# EAGLE board driverMotor_IlhamWidyoNugroho_21507334002_GK1 (EAGLE 7.3.0)
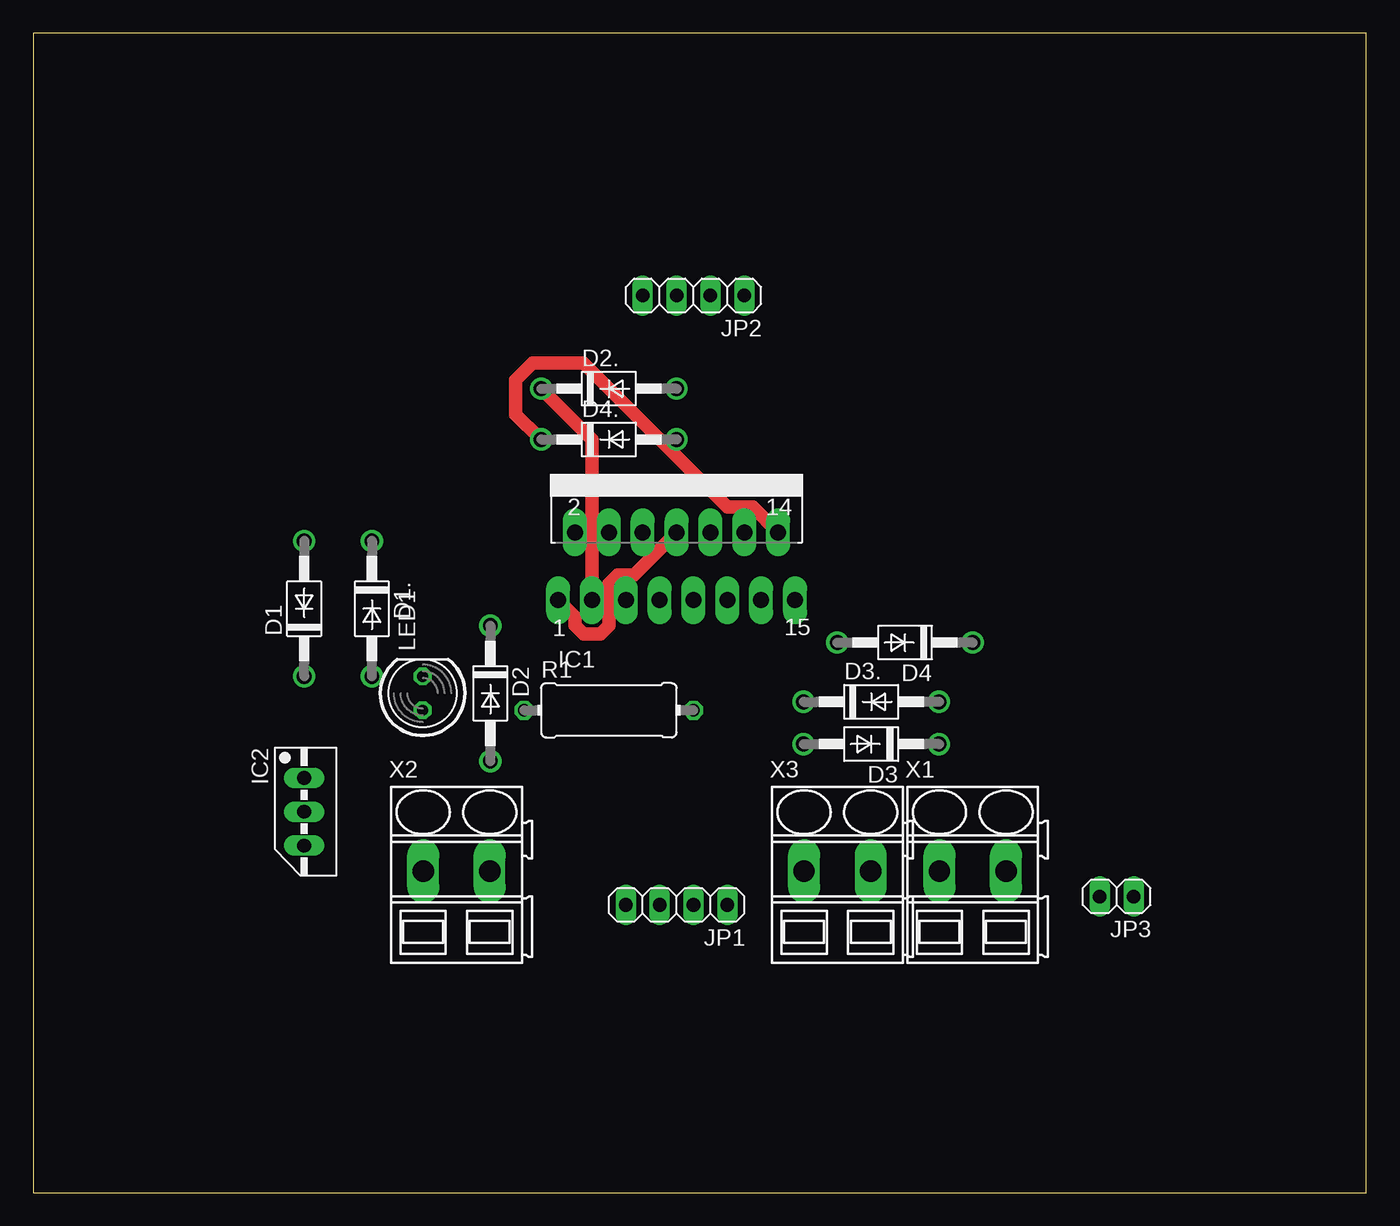
[diagram p0: board, top side]
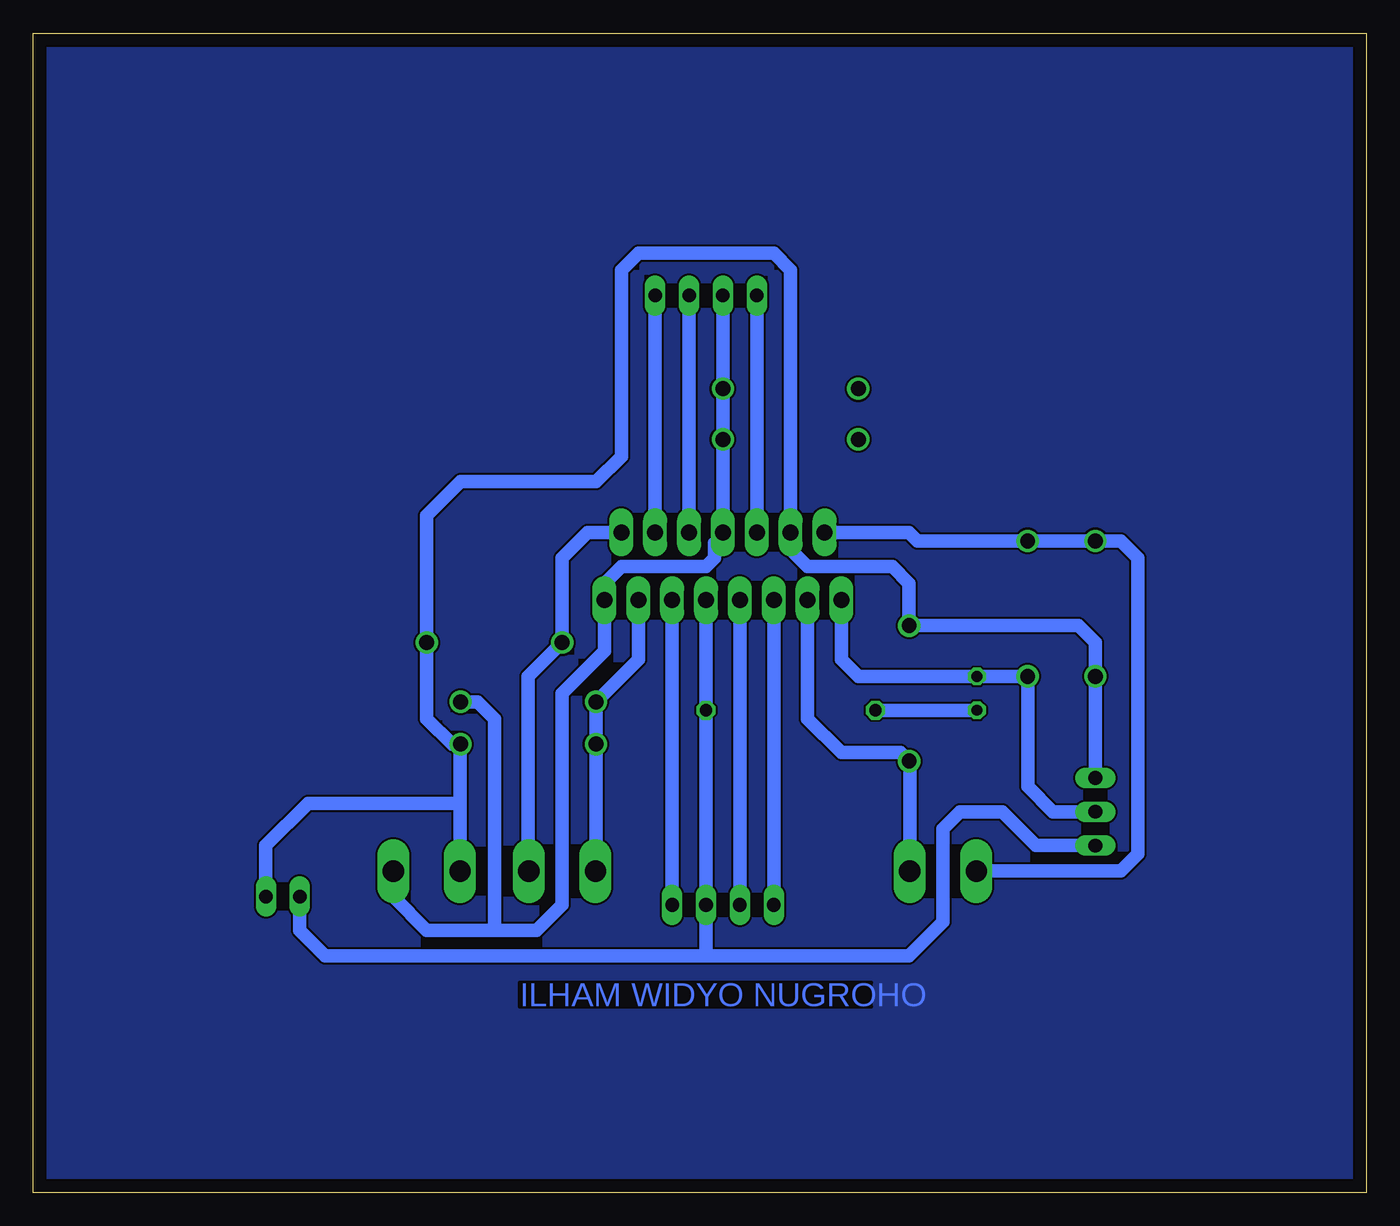
[diagram p1: board, bottom side, seen from below]

Size 100 x 86.98 mm. Coordinates in mm from the lower left corner, seen from the top.
Outline: 0,0 100,0 100,86.98 0,86.98 0,0
Copper layers (1*16): Top 0.035mm / dielectric 1.5mm / Bottom 0.035mm
Design rules "default": minimum track width 6mil, minimum drill 0.35mm, track to track 6mil, track to pad 6mil, pad to pad 6mil, via to via 6mil, smd to smd 6mil, copper to edge 40mil, drill to drill 6mil, minimum pad ring 10mil, minimum via ring 8mil, stop-mask expansion 4mil, vias tented up to drill 0mil, thermal gap 10mil

## Footprints (pad centres in the part's own frame; a part is rotated, then mirrored left to right if it is on the bottom)
DO41-10 = drill 1.118: A 5.08,0; C -5.08,0
MULTIWATT-15 = drill 1.2 long: 1 -8.89,-7.62; 2 -7.62,-2.54; 3 -6.35,-7.62; 4 -5.08,-2.54; 5 -3.81,-7.62; 6 -2.54,-2.54; 7 -1.27,-7.62; 8 0,-2.54; 9 1.27,-7.62; 10 2.54,-2.54; 11 3.81,-7.62; 12 5.08,-2.54; 13 6.35,-7.62; 14 7.62,-2.54; 15 8.89,-7.62
78MXXS = drill 1.016 long: GND 0,-2.54; IN -2.54,-2.54; OUT 2.54,-2.54
1X04 = drill 1.016 long: 1 -3.81,0; 2 -1.27,0; 3 1.27,0; 4 3.81,0
1X02 = drill 1.016 long: 1 -1.27,0; 2 1.27,0
LED5MM = drill 0.813 octagon: A -1.27,0; K 1.27,0
0411/12 = drill 0.914 octagon: 1 -6.35,0; 2 6.35,0
SMKDSP_1,5/2 = drill 1.6 pad 1.8 long: 1 -2.5,0; 2 2.5,0

## Placement (x,y rotation side)
D1  1N4004  [DO41-10]  20.32,43.81 90 top
D1.  1N4004  [DO41-10]  25.4,43.81 270 top
D2  1N4004  [DO41-10]  34.29,37.47 270 top
D2.  1N4004  [DO41-10]  43.18,60.32 0 top
D3  1N4004  [DO41-10]  62.86,33.66 180 top
D3.  1N4004  [DO41-10]  62.86,36.83 0 top
D4  1N4004  [DO41-10]  65.41,41.27 180 top
D4.  1N4004  [DO41-10]  43.18,56.52 0 top
IC1  L298  [MULTIWATT-15]  48.26,52.07 0 top
IC2  [78MXXS]  22.86,28.58 270 top
JP1  [1X04]  48.26,21.59 180 top
JP2  [1X04]  49.53,67.31 180 top
JP3  [1X02]  81.28,22.23 180 top
LED1  [LED5MM]  29.21,37.47 90 top
R1  [0411/12]  43.18,36.2 0 top
X1  SMKDSP_1,5/2  [SMKDSP_1,5/2]  70.48,24.13 0 top
X2  SMKDSP_1,5/2  [SMKDSP_1,5/2]  31.75,24.13 0 top
X3  SMKDSP_1,5/2  [SMKDSP_1,5/2]  60.32,24.13 0 top

## Library data of the parts
D1 D1. D2 D2. D3 D3. D4 D4. = diode
IC1 = st-microelectronics
IC2 = v-reg
JP1-JP3 = pinhead
LED1 = led
R1 = resistor
X1-X3 = con-phoenix-smkdsp; MF: FARNELL; MPN: 1733570; OC_FARNELL: 3041244; OC_NEWARK: 69C8588

## Nets
+5V: IC1.9 IC2.OUT JP1.2 JP3.2 R1.2
ENABLE_A: IC1.6 JP2.4
ENABLE_B: IC1.11 JP1.1
GND: D1..A D2..A D3..A D4..A IC1.1 IC1.8 IC1.15 IC2.GND JP2.3 LED1.K X1.2
INPUT1: IC1.5 JP1.4
INPUT2: IC1.7 JP1.3
INPUT3: IC1.10 JP2.2
INPUT4: IC1.12 JP2.1
LED: LED1.A R1.1
MOTOR1_1: D1..C D1.A IC1.2 X2.1
MOTOR1_2: D2..C D2.A IC1.3 X2.2
MOTOR2_1: D3..C D3.A IC1.13 X3.1
MOTOR2_2: D4..C D4.A IC1.14 X3.2
VS: D1.C D2.C D3.C D4.C IC1.4 IC2.IN JP3.1 X1.1

## Tracks (layer width: path | path; a pad name or v marks a point on that pad's centre or on a via)
+5V
  Bottom 1.016: JP3.2 80.01,19.69 78.11,17.78 49.53,17.78 | IC1.9 R1.2 JP1.2 49.53,17.78 | IC2.OUT 24.77,26.04 27.31,28.58 30.48,28.58 31.75,27.3 31.75,20.32 34.29,17.78 49.53,17.78
ENABLE_A
  Bottom 1.016: JP2.4 IC1.6
ENABLE_B
  Bottom 1.016: IC1.11 JP1.1
GND
  Top 1.016: IC1.1 40.64,43.18 40.64,42.55 41.27,41.91 42.54,41.91 43.18,42.55 43.18,45.72 43.81,46.35 45.09,46.35 IC1.8
  Bottom 0.152: 48.49,49.15 IC1.8 | 56.87,44.88 IC1.15
  Bottom 1.016: X1.2 72.98,22.19 70.48,19.69 65.41,19.69 | 65.41,19.69 62.23,19.69 60.32,21.59 60.32,37.47 57.15,40.64 IC1.15 57.15,45.72 55.88,46.99 49.53,46.99 48.89,47.62 48.89,48.74 48.49,49.15 | IC1.1 39.37,40.01 38.1,38.73 LED1.K D1..A 25.4,30.48 23.5,28.58 IC2.GND | JP2.3 D2..A D4..A IC1.8 | D3..A 66.68,36.83 65.41,35.56 65.41,19.69
INPUT1
  Bottom 1.016: IC1.5 JP1.4
INPUT2
  Bottom 1.016: JP1.3 IC1.7
INPUT3
  Bottom 1.016: JP2.2 IC1.10
INPUT4
  Bottom 1.016: JP2.1 IC1.12
LED
  Bottom 1.016: LED1.A R1.1
MOTOR1_1
  Bottom 1.016: X2.1 18.42,24.13 17.15,25.4 17.15,47.62 18.42,48.89 D1.A D1..C 33.66,48.89 34.29,49.53 IC1.2
MOTOR1_2
  Top 0.152: 38.12,60.27 D2..C
  Top 1.016: 38.12,60.27 41.91,56.49 IC1.3
  Bottom 1.016: X2.2 34.25,32.34 D2.A 34.92,33.02 39.37,33.02 41.91,35.56 IC1.3
MOTOR2_1
  Bottom 1.016: X3.1 57.78,24.17 D3.A D3..C 54.61,40.01 IC1.13
MOTOR2_2
  Top 0.152: 37.97,56.62 D4..C
  Top 1.016: 37.97,56.62 36.2,58.39 36.2,60.96 37.46,62.23 41.27,62.23 52.07,51.43 53.98,51.43 IC1.14
  Bottom 1.016: IC1.14 58.42,49.53 60.32,47.62 D4.A 62.86,38.73 62.86,24.17 X3.2
S$1
  pour Bottom: 0,86.36 0,0 100.33,0 100.33,87 0,87
VS
  Bottom 1.016: D3.C 67.98,33.62 | 67.98,33.62 67.98,29.21 | 67.98,29.21 X1.1 | JP3.1 82.55,26.04 79.38,29.21 67.98,29.21 | IC2.IN D1.C 20.32,41.27 21.59,42.55 D2.C 34.29,45.72 35.56,46.99 41.91,46.99 43.18,48.26 IC1.4 43.18,69.22 44.45,70.48 54.61,70.48 55.88,69.22 55.88,55.24 57.78,53.34 67.95,53.34 70.48,50.8 D4.C 70.48,35.56 68.54,33.62 67.98,33.62

## Text on the board
Bottom: ILHAM WIDYO NUGROHO